# EAGLE board CT_schematic (EAGLE 7.6.0)

Size 100 x 80 mm. Coordinates in mm from the lower left corner, seen from the top.
Outline: 0,0 100,0 100,80 0,80 0,0
Copper layers (1*16): Top 0.035mm / dielectric 1.5mm / Bottom 0.035mm
Design rules "default": minimum track width 10mil, minimum drill 24mil, track to track 8mil, track to pad 8mil, pad to pad 8mil, via to via 8mil, smd to smd 8mil, copper to edge 40mil, drill to drill 8mil, minimum pad ring 10mil, minimum via ring 8mil, stop-mask expansion 4mil, vias tented up to drill 0mil, thermal gap 10mil

## Footprints (pad centres in the part's own frame; a part is rotated, then mirrored left to right if it is on the bottom)
C0603 = smd 0.8 x 0.8: 1 -0.762,0; 2 0.762,0
C0402 = smd 0.5 x 0.5: 1 -0.508,0; 2 0.508,0
C0805 = smd 1.2 x 1.3: 1 -1.016,0; 2 1.016,0
C1210 = smd 1.2 x 2.5: 1 -1.524,0; 2 1.524,0
R0603 = smd 0.8 x 0.8: 1 -0.762,0; 2 0.762,0
EXV-9H = smd 3.505 x 1.676: 1 -2.857,0; 2 2.857,0
L0603 = smd 0.8 x 0.8: 1 -0.762,0; 2 0.762,0
PJ-037B_PACKAGE = drill 3.7 square: 1 12,0 | drill 3.2 square: 2 6,0
WLCSP90 = smd 0.25 x 0.25: A1 -1.8,1.6; A2 -1.4,1.6; A3 -1,1.6; A4 -0.6,1.6; A5 -0.2,1.6; A6 0.2,1.6; A7 0.6,1.6; A8 1,1.6; A9 1.4,1.6; A10 1.8,1.6; B1 -1.8,1.2; B2 -1.4,1.2; B3 -1,1.2; B4 -0.6,1.2; B5 -0.2,1.2; B6 0.2,1.2; B7 0.6,1.2; B8 1,1.2; B9 1.4,1.2; B10 1.8,1.2; C1 -1.8,0.8; C2 -1.4,0.8; C3 -1,0.8; C4 -0.6,0.8; C5 -0.2,0.8; C6 0.2,0.8; C7 0.6,0.8; C8 1,0.8; C9 1.4,0.8; C10 1.8,0.8; D1 -1.8,0.4; D2 -1.4,0.4; D3 -1,0.4; D4 -0.6,0.4; D5 -0.2,0.4; D6 0.2,0.4; D7 0.6,0.4; D8 1,0.4; D9 1.4,0.4; D10 1.8,0.4; E1 -1.8,0; E2 -1.4,0; E3 -1,0; E4 -0.6,0; E5 -0.2,0; E6 0.2,0; E7 0.6,0; E8 1,0; E9 1.4,0; E10 1.8,0; F1 -1.8,-0.4; F2 -1.4,-0.4; F3 -1,-0.4; F4 -0.6,-0.4; F5 -0.2,-0.4; F6 0.2,-0.4; F7 0.6,-0.4; F8 1,-0.4; F9 1.4,-0.4; F10 1.8,-0.4; G1 -1.8,-0.8; G2 -1.4,-0.8; G3 -1,-0.8; G4 -0.6,-0.8; G5 -0.2,-0.8; G6 0.2,-0.8; G7 0.6,-0.8; G8 1,-0.8; G9 1.4,-0.8; G10 1.8,-0.8; H1 -1.8,-1.2; H2 -1.4,-1.2; H3 -1,-1.2; H4 -0.6,-1.2; H5 -0.2,-1.2; H6 0.2,-1.2; H7 0.6,-1.2; H8 1,-1.2; H9 1.4,-1.2; H10 1.8,-1.2; J1 -1.8,-1.6; J2 -1.4,-1.6; J3 -1,-1.6; J4 -0.6,-1.6; J5 -0.2,-1.6; J6 0.2,-1.6; J7 0.6,-1.6; J8 1,-1.6; J9 1.4,-1.6; J10 1.8,-1.6
SAMTEC_FTSH-105-01-L-DV-K = smd 0.762 x 2.794: 1 -2.54,-2.032; 2 -2.54,2.032; 3 -1.27,-2.032; 4 -1.27,2.032; 5 0,-2.032; 6 0,2.032; 7 1.27,-2.032; 8 1.27,2.032; 9 2.54,-2.032; 10 2.54,2.032
SOT-23-8 = smd 0.4 x 1.2: 1 -0.975,-1.3; 2 -0.325,-1.3; 3 0.325,-1.3; 4 0.975,-1.3; 5 0.975,1.3; 6 0.325,1.3; 7 -0.325,1.3; 8 -0.975,1.3
182-009-MALE = drill 1.194 pad 1.524 octagon: 1 -5.537,10.923; 2 -2.769,10.923; 3 0,10.923; 4 2.769,10.923; 5 5.537,10.923; 6 -4.153,8.08; 7 -1.384,8.08; 8 1.384,8.08; 9 4.153,8.08 | hole 3.048: -12.446,9.501; 12.446,9.501
MOLEX_47219-2001 = smd 0.8 x 1.5: 1 3.2,-2.1; 2 2.1,-2.1; 3 1,-2.1; 4 -0.1,-2.1; 5 -1.2,-2.1; 6 -2.3,-2.1; 7 -3.4,-2.1; 8 -4.5,-2.1 | smd 1.5 x 2.05: G1 6.875,-4.7; G2 6.875,3.6; G3 -6.875,3.6; G4 -6.875,-4.7
VFBGA-63 = smd 0.4 x 0.4: A1 -3.6,4.4; A2 -2.8,4.4; A9 2.8,4.4; A10 3.6,4.4; B1 -3.6,3.6; B9 2.8,3.6; B10 3.6,3.6; C3 -2,2.8; C4 -1.2,2.8; C5 -0.4,2.8; C6 0.4,2.8; C7 1.2,2.8; C8 2,2.8; D3 -2,2; D4 -1.2,2; D5 -0.4,2; D6 0.4,2; D7 1.2,2; D8 2,2; E3 -2,1.2; E4 -1.2,1.2; E5 -0.4,1.2; E6 0.4,1.2; E7 1.2,1.2; E8 2,1.2; F3 -2,0.4; F4 -1.2,0.4; F5 -0.4,0.4; F6 0.4,0.4; F7 1.2,0.4; F8 2,0.4; G3 -2,-0.4; G4 -1.2,-0.4; G5 -0.4,-0.4; G6 0.4,-0.4; G7 1.2,-0.4; G8 2,-0.4; H3 -2,-1.2; H4 -1.2,-1.2; H5 -0.4,-1.2; H6 0.4,-1.2; H7 1.2,-1.2; H8 2,-1.2; J3 -2,-2; J4 -1.2,-2; J5 -0.4,-2; J6 0.4,-2; J7 1.2,-2; J8 2,-2; K3 -2,-2.8; K4 -1.2,-2.8; K5 -0.4,-2.8; K6 0.4,-2.8; K7 1.2,-2.8; K8 2,-2.8; L1 -3.6,-3.6; L2 -2.8,-3.6; L9 2.8,-3.6; L10 3.6,-3.6; M1 -3.6,-4.4; M2 -2.8,-4.4; M9 2.8,-4.4; M10 3.6,-4.4
ABLS-25.000MHZ-B2F-T = smd 5.6 x 2.8: 1 -3.81,0; 2 5.69,0
ASEK = smd 1.4 x 1: 1 -1.1,-0.8; 2 1.1,-0.8; 3 1.1,0.8; 4 -1.1,0.8
WSON-8 = smd 0.3 x 0.6: 1 -0.75,0; 2 0.05,0; 3 0.85,0; 4 1.65,0; 5 1.65,3.8; 6 0.85,3.8; 7 0.05,3.8; 8 -0.75,3.8 | smd 3 x 2.6: PAD 0.45,1.9
QFN-38_UHF = smd 0.75 x 0.3: 1 -2.4,2.75; 2 -2.4,2.25; 3 -2.4,1.75; 4 -2.4,1.25; 6 -2.4,0.25; 7 -2.4,-0.25; 8 -2.4,-0.75; 9 -2.4,-1.25; 10 -2.4,-1.75; 11 -2.4,-2.25; 12 -2.4,-2.75; 20 2.4,-2.75; 21 2.4,-2.25; 22 2.4,-1.75; 23 2.4,-1.25; 24 2.4,-0.75; 25 2.4,-0.25; 26 2.4,0.25; 27 2.4,0.75; 28 2.4,1.25; 29 2.4,1.75; 30 2.4,2.25; 31 2.4,2.75 | smd 0.758 x 0.3: 5 -2.4,0.75 | smd 0.3 x 0.75: 13 -1.5,-3.4; 14 -1,-3.4; 15 -0.5,-3.4; 16 0,-3.4; 17 0.5,-3.4; 18 1,-3.4; 19 1.5,-3.4; 32 1.5,3.4; 33 1,3.4; 34 0.5,3.4; 35 0,3.4; 36 -0.5,3.4; 37 -1,3.4; 38 -1.5,3.4 | smd 3.2 x 5.2: 39 0,0
IRF8306MTRPBF = smd 0.9 x 1.85: 1 0,0; 2 0,-2.35; 6 6.4,0; 7 6.4,-2.35 | smd 0.75 x 0.75: 3 1.75,-1.175 | smd 1.45 x 0.87: 4 3.5,-0.565; 5 3.5,-1.785
SW_4-1437565-2 = smd 1.4 x 2.1: 1 -2.23,4.55; 2 -2.23,-4.55; 3 2.23,4.55; 4 2.23,-4.55
LGM67K-G1J2-24-Z = smd 0.8 x 1.4: A -2,0; C 0,0
NC7SZ125M5X = smd 1.3 x 0.7: 1 -1.3,0.95; 2 -1.3,0; 3 -1.3,-0.95; 4 1.3,-0.95; 5 1.3,0.95
DUMMY_PACKAGE_230 = drill 0.3: 1 0,-1; 2 1.5,-1

## Placement (x,y rotation side)
C1  1e-06  [C0603]  -76.2,78.74 0 top  (outside the outline)
C2  1e-07  [C0603]  -80.01,78.74 0 top  (outside the outline)
C3  1e-07  [C0603]  -83.82,78.74 0 top  (outside the outline)
C4  1e-07  [C0603]  -15.24,83.82 0 top  (outside the outline)
C5  1e-07  [C0603]  -19.05,83.82 0 top  (outside the outline)
C6  1e-07  [C0603]  -22.86,83.82 0 top  (outside the outline)
C7  1e-07  [C0603]  -26.67,83.82 0 top  (outside the outline)
C8  4.7e-06  [C0603]  -64.77,78.74 0 top  (outside the outline)
C9  1e-08  [C0603]  -30.48,83.82 0 top  (outside the outline)
C10  1e-06  [C0603]  -34.29,83.82 0 top  (outside the outline)
C11  1e-07  [C0402]  -80.01,83.82 0 top  (outside the outline)
C12  1e-07  [C0402]  -83.82,83.82 0 top  (outside the outline)
C13  1e-11  [C0402]  -15.24,88.9 0 top  (outside the outline)
C14  1e-11  [C0402]  -19.05,88.9 0 top  (outside the outline)
C15  1e-07  [C0402]  -22.86,88.9 0 top  (outside the outline)
C16  1e-07  [C0402]  -26.67,88.9 0 top  (outside the outline)
C17  1e-07  [C0402]  -30.48,88.9 0 top  (outside the outline)
C18  1e-05  [C0805]  -27.94,67.31 0 top  (outside the outline)
C19  1e-07  [C0402]  -34.29,88.9 0 top  (outside the outline)
C20  1e-07  [C0402]  -38.1,88.9 0 top  (outside the outline)
C21  1e-07  [C0402]  -41.91,88.9 0 top  (outside the outline)
C22  1e-07  [C0402]  -45.72,88.9 0 top  (outside the outline)
C23  2.2e-06  [C0603]  -68.58,78.74 0 top  (outside the outline)
C24  1e-08  [C0402]  -49.53,88.9 0 top  (outside the outline)
C25  1e-08  [C0402]  -53.34,88.9 0 top  (outside the outline)
C26  1e-05  [C1210]  -59.69,59.69 0 top  (outside the outline)
C27  1e-05  [C0805]  -33.02,67.31 0 top  (outside the outline)
C28  1e-08  [C0402]  -57.15,88.9 0 top  (outside the outline)
C29  1e-05  [C1210]  -66.04,59.69 0 top  (outside the outline)
C30  1e-05  [C1210]  -72.39,59.69 0 top  (outside the outline)
C31  1e-08  [C0402]  -60.96,88.9 0 top  (outside the outline)
C32  1e-05  [C1210]  -78.74,59.69 0 top  (outside the outline)
C33  1e-05  [C0805]  -38.1,67.31 0 top  (outside the outline)
C34  1e-07  [C0402]  -64.77,88.9 0 top  (outside the outline)
C35  2.2e-06  [C0603]  -72.39,78.74 0 top  (outside the outline)
C36  2.45e-08  [R0603]  -35.56,73.66 0 top  (outside the outline)
C37  2.8258362168397e-09  [R0603]  -48.26,67.31 0 top  (outside the outline)
C38  7.105e-09  [R0603]  -60.96,67.31 0 top  (outside the outline)
C39  0.0001  [EXV-9H]  -82.55,50.8 0 top  (outside the outline)
C40  0.0001  [EXV-9H]  -17.78,60.96 0 top  (outside the outline)
C41  1e-08  [C0402]  -68.58,88.9 0 top  (outside the outline)
C42  1e-08  [C0402]  -72.39,88.9 0 top  (outside the outline)
F1  240.0  [L0603]  -38.1,83.82 0 top  (outside the outline)
J1  PJ-037B  [PJ-037B_PACKAGE]  -57.15,29.21 0 top  (outside the outline)
R2  1000.0  [R0603]  -41.91,83.82 0 top  (outside the outline)
R7  4700.0  [R0603]  -45.72,83.82 0 top  (outside the outline)
R8  10000.0  [R0603]  -40.64,73.66 0 top  (outside the outline)
R9  10000.0  [R0603]  -45.72,73.66 0 top  (outside the outline)
R10  10000.0  [R0603]  -50.8,73.66 0 top  (outside the outline)
R11  10000.0  [R0603]  -55.88,73.66 0 top  (outside the outline)
R12  10000.0  [R0603]  -60.96,73.66 0 top  (outside the outline)
R13  10000.0  [R0603]  -66.04,73.66 0 top  (outside the outline)
R14  5.0  [R0603]  -49.53,83.82 0 top  (outside the outline)
R15  120.0  [R0603]  -53.34,83.82 0 top  (outside the outline)
R16  100000.0  [R0603]  -66.04,67.31 0 top  (outside the outline)
R17  100000.0  [R0603]  -71.12,67.31 0 top  (outside the outline)
R18  100000.0  [R0603]  -76.2,67.31 0 top  (outside the outline)
R19  100000.0  [R0603]  -81.28,67.31 0 top  (outside the outline)
R20  100000.0  [R0603]  -86.36,67.31 0 top  (outside the outline)
R21  100000.0  [R0603]  -15.24,73.66 0 top  (outside the outline)
R22  10000.0  [R0603]  -71.12,73.66 0 top  (outside the outline)
R23  10000.0  [R0603]  -76.2,73.66 0 top  (outside the outline)
R24  10000.0  [R0603]  -81.28,73.66 0 top  (outside the outline)
R25  10000.0  [R0603]  -86.36,73.66 0 top  (outside the outline)
R26  10000.0  [R0603]  -15.24,78.74 0 top  (outside the outline)
R27  100000.0  [R0603]  -20.32,73.66 0 top  (outside the outline)
R28  200.0  [R0603]  -57.15,83.82 0 top  (outside the outline)
R29  1000.0  [R0603]  -60.96,83.82 0 top  (outside the outline)
R30  100000.0  [R0603]  -25.4,73.66 0 top  (outside the outline)
R31  2231.0  [R0603]  -64.77,83.82 0 top  (outside the outline)
R32  1000.0  [R0603]  -68.58,83.82 0 top  (outside the outline)
R33  100000.0  [R0603]  -30.48,73.66 0 top  (outside the outline)
R34  200.0  [R0603]  -72.39,83.82 0 top  (outside the outline)
R35  1000.0  [R0603]  -76.2,83.82 0 top  (outside the outline)
R36  10000.0  [R0603]  -20.32,78.74 0 top  (outside the outline)
R37  75000.0  [R0603]  -25.4,78.74 0 top  (outside the outline)
R38  10000.0  [R0603]  -30.48,78.74 0 top  (outside the outline)
R39  10000.0  [R0603]  -35.56,78.74 0 top  (outside the outline)
R40  95300.0  [R0603]  -40.64,78.74 0 top  (outside the outline)
R41  95300.0  [R0603]  -45.72,78.74 0 top  (outside the outline)
R42  10000.0  [R0603]  -50.8,78.74 0 top  (outside the outline)
R43  10000.0  [R0603]  -55.88,78.74 0 top  (outside the outline)
R44  10000.0  [R0603]  -60.96,78.74 0 top  (outside the outline)
R45  103345.45454545  [R0603]  -55.88,67.31 0 top  (outside the outline)
U1  STM32F405OEY6  [WLCSP90]  -44.45,52.07 0 top  (outside the outline)
U2  FTSH-105-01-L-DV-K  [SAMTEC_FTSH-105-01-L-DV-K]  -35.56,30.48 0 top  (outside the outline)
U3  MAX3051EKA+T  [SOT-23-8]  -83.82,58.42 0 top  (outside the outline)
U4  182-009-113R531  [182-009-MALE]  -36.83,6.35 0 top  (outside the outline)
U5  0472192001  [MOLEX_47219-2001]  -62.23,8.89 0 top  (outside the outline)
U6  mt29f4g08abadah4  [VFBGA-63]  -63.5,27.94 0 top  (outside the outline)
U7  ABLS-25.000MHZ-B2F-T  [ABLS-25.000MHZ-B2F-T]  -36.83,60.96 0 top  (outside the outline)
U8  ASEK-32.768KHz-ECST  [ASEK]  -73.66,50.8 0 top  (outside the outline)
U9  LP3878SDX-ADJ/NOPB  [WSON-8]  -60.96,40.64 0 top  (outside the outline)
U10  LP3878SDX-ADJ/NOPB  [WSON-8]  -81.28,40.64 0 top  (outside the outline)
U11  LP3878SDX-ADJ/NOPB  [WSON-8]  -30.48,49.53 0 top  (outside the outline)
U12  LTC2928CUHF#PBF  [QFN-38_UHF]  -52.07,50.8 0 top  (outside the outline)
U13  IRF8306MTRPbF  [IRF8306MTRPBF]  -26.67,43.18 0 top  (outside the outline)
U14  IRF8306MTRPbF  [IRF8306MTRPBF]  -41.91,43.18 0 top  (outside the outline)
U15  4-1437565-2  [SW_4-1437565-2]  -83.82,27.94 0 top  (outside the outline)
U16  Q65110A2395  [LGM67K-G1J2-24-Z]  -48.26,59.69 0 top  (outside the outline)
U17  nc7sz125m5x  [NC7SZ125M5X]  -15.24,67.31 0 top  (outside the outline)
U18  nc7sz125m5x  [NC7SZ125M5X]  -21.59,67.31 0 top  (outside the outline)
U19  Dummy  [DUMMY_PACKAGE_230]  -77.47,88.9 0 top  (outside the outline)

## Library data of the parts
C1-C42 F1 J1 R2 R7-R45 U1-U19 = circuit_tree

## Nets
CLK_CRYSTAL_U1_F9: C13.1 U1.F9 U7.1
CLK_CRYSTAL_U1_F10: C14.1 U1.F10 U7.2
CLK_U1_B10: U1.B10 U8.3
GND: C1.2 C2.2 C3.2 C4.2 C5.2 C6.2 C7.2 C8.2 C9.2 C10.2 C11.2 C12.2 C13.2 C14.2 C15.2 C16.2 C17.2 C18.2 C19.2 C20.2 C21.2 C22.2 C23.2 C24.2 C25.2 C26.2 C27.2 C28.2 C29.2 C30.2 C31.2 C32.2 C33.2 C34.2 C35.2 C36.2 C37.2 C38.2 C39.2 C40.2 C41.2 C42.2 J1.2 R2.2 R9.2 R14.2 R29.2 R32.2 R35.2 R37.2 R40.2 R41.2 R42.2 R43.2 R44.2 U1.C9 U1.E5 U1.E7 U1.E8 U1.H10 U2.3 U2.5 U3.2 U3.8 U4.5 U5.6 U5.G1 U5.G2 U5.G3 U5.G4 U6.C5 U6.F7 U6.K3 U6.K8 U8.2 U9.3 U9.PAD U10.3 U10.PAD U11.3 U11.PAD U12.8 U12.9 U12.10 U12.12 U12.13 U12.24 U12.25 U12.30 U12.32 U12.39 U16.C U17.2 U17.3 U18.1 U18.3 U19.1
NET_U1_A7: R9.1 U1.A7
NET_U1_A8: R8.1 U1.A8
NET_U1_B1: C12.1 U1.B1
NET_U1_D9: R10.1 U1.D9
NET_U1_G9: C9.1 C10.1 F1.1 U1.G9
NET_U1_G10: R7.1 U1.G10 U18.4
NET_U1_J9: U16.A
NET_U1_J10: U15.3 U15.4
NET_U2_9: R14.1 U2.9
NET_U3_6: R15.2 U3.6
NET_U4_2: R15.2 U3.6 U4.2
NET_U4_3: R15.1 U3.7 U4.3
NET_U6_C3: R26.1 U6.C3
NET_U9_1: C25.1 U9.1
NET_U9_6: R28.2 R29.1 U9.6
NET_U9_8: R27.1 U9.8
NET_U10_1: C28.1 U10.1
NET_U10_6: R31.2 R32.1 U10.6
NET_U10_8: R30.1 U10.8
NET_U11_1: C31.1 U11.1
NET_U11_6: R34.2 R35.1 U11.6
NET_U11_8: R33.1 U11.8
NET_U12_3: R43.1 U12.3
NET_U12_6: R40.1 U12.6
NET_U12_7: R41.1 U12.7
NET_U12_16: R42.1 R45.1 U12.16
NET_U12_18: R39.1 U12.18
NET_U12_19: R38.1 U12.19 U12.20
NET_U12_21: R36.1 R37.1 U12.21 U17.4 U18.2
NET_U12_22: C34.1 R36.2 R38.2 R39.2 U12.11 U12.22
NET_U12_26: C37.1 U12.26
NET_U12_27: C36.1 U12.27
NET_U12_28: C38.1 U12.28
NET_U12_38: R44.1 U12.38
NET_U13_3: U12.2 U13.3
NET_U14_3: U12.37 U14.3
NET_U15_1: R2.1 U15.1 U15.2
PROC_CAN1_RX: U1.C1 U3.4
PROC_CAN1_TX: U1.C2 U3.1
PROC_DAC_OUT2: U1.G8 U19.2
PROC_FSMC_D0: U1.F2 U6.H4
PROC_FSMC_D1: U1.F1 U6.J4
PROC_FSMC_D2: U1.D6 U6.K4
PROC_FSMC_D3: U1.C5 U6.K5
PROC_FSMC_D4: U1.G6 U6.K6
PROC_FSMC_D5: U1.H6 U6.J7
PROC_FSMC_D6: U1.J6 U6.K7
PROC_FSMC_D7: U1.F6 U6.J8
PROC_FSMC_NCE2: R23.1 U1.A5 U6.C6
PROC_FSMC_NOE: R25.1 U1.A4 U6.D4
PROC_FSMC_NWAIT: R22.1 U1.B5 U6.C8
PROC_FSMC_NWE: R24.1 U1.C6 U6.C7
PROC_SDIO_CK: R17.1 U1.A3 U5.5
PROC_SDIO_CMD: R16.1 U1.B4 U5.3
PROC_SDIO_D0: R18.1 U1.E2 U5.7
PROC_SDIO_D1: R19.1 U1.E3 U5.8
PROC_SDIO_D2: R20.1 U1.D5 U5.1
PROC_SDIO_D3: R21.1 U1.C4 U5.2
PROC_SYS_JTCK_SWCLK: R12.1 U1.A2 U2.4
PROC_SYS_JTDO_SWO: U1.B6 U2.6
PROC_SYS_JTMS_SWDIO: R13.1 U1.D4 U2.2
RST_OUT_U2_JTAG_RST_B: R11.1 U2.10 U17.1
VCC_12V7: C35.1 C39.1 C40.1 J1.1 R45.2 U12.23 U13.1 U13.2 U13.6 U13.7 U14.1 U14.2 U14.6 U14.7
VCC_S1_12V7: C26.1 C29.1 R27.2 R30.2 U9.4 U10.4 U13.4 U13.5
VCC_S2_12V7: C32.1 R33.2 U11.4 U14.4 U14.5
VCC_TIER1_1V2: C11.1 C27.1 R28.1 U1.F4 U9.5
VCC_TIER1_3V3: C1.1 C2.1 C3.1 C4.1 C5.1 C6.1 C7.1 C8.1 C15.1 C16.1 C17.1 C18.1 C19.1 C20.1 C21.1 C22.1 C23.1 C24.1 C30.1 C41.1 C42.1 F1.2 R7.2 R8.2 R10.2 R11.2 R12.2 R13.2 R16.2 R17.2 R18.2 R19.2 R20.2 R21.2 R22.2 R23.2 R24.2 R25.2 R26.2 R31.1 U1.A1 U1.A10 U1.B8 U1.E4 U1.E6 U1.F7 U2.1 U3.3 U5.4 U6.D3 U6.G4 U6.H8 U6.J6 U8.4 U10.5 U17.5 U18.5
VCC_TIER2_1V2: C33.1 R34.1 U11.5

## Tracks (layer width: path | path; a pad name or v marks a point on that pad's centre or on a via)
CLK_CRYSTAL_U1_F9  (2 unrouted)
CLK_CRYSTAL_U1_F10  (2 unrouted)
CLK_U1_B10  (1 unrouted)
GND  (96 unrouted)
NET_U1_A7  (1 unrouted)
NET_U1_A8  (1 unrouted)
NET_U1_B1  (1 unrouted)
NET_U1_D9  (1 unrouted)
NET_U1_G9  (3 unrouted)
NET_U1_G10  (2 unrouted)
NET_U1_J10  (1 unrouted)
NET_U2_9  (1 unrouted)
NET_U3_6  (1 unrouted)
NET_U4_2  (2 unrouted)
NET_U4_3  (2 unrouted)
NET_U6_C3  (1 unrouted)
NET_U9_1  (1 unrouted)
NET_U9_6  (2 unrouted)
NET_U9_8  (1 unrouted)
NET_U10_1  (1 unrouted)
NET_U10_6  (2 unrouted)
NET_U10_8  (1 unrouted)
NET_U11_1  (1 unrouted)
NET_U11_6  (2 unrouted)
NET_U11_8  (1 unrouted)
NET_U12_3  (1 unrouted)
NET_U12_6  (1 unrouted)
NET_U12_7  (1 unrouted)
NET_U12_16  (2 unrouted)
NET_U12_18  (1 unrouted)
NET_U12_19  (2 unrouted)
NET_U12_21  (4 unrouted)
NET_U12_22  (5 unrouted)
NET_U12_26  (1 unrouted)
NET_U12_27  (1 unrouted)
NET_U12_28  (1 unrouted)
NET_U12_38  (1 unrouted)
NET_U13_3  (1 unrouted)
NET_U14_3  (1 unrouted)
NET_U15_1  (2 unrouted)
PROC_CAN1_RX  (1 unrouted)
PROC_CAN1_TX  (1 unrouted)
PROC_DAC_OUT2  (1 unrouted)
PROC_FSMC_D0  (1 unrouted)
PROC_FSMC_D1  (1 unrouted)
PROC_FSMC_D2  (1 unrouted)
PROC_FSMC_D3  (1 unrouted)
PROC_FSMC_D4  (1 unrouted)
PROC_FSMC_D5  (1 unrouted)
PROC_FSMC_D6  (1 unrouted)
PROC_FSMC_D7  (1 unrouted)
PROC_FSMC_NCE2  (2 unrouted)
PROC_FSMC_NOE  (2 unrouted)
PROC_FSMC_NWAIT  (2 unrouted)
PROC_FSMC_NWE  (2 unrouted)
PROC_SDIO_CK  (2 unrouted)
PROC_SDIO_CMD  (2 unrouted)
PROC_SDIO_D0  (2 unrouted)
PROC_SDIO_D1  (2 unrouted)
PROC_SDIO_D2  (2 unrouted)
PROC_SDIO_D3  (2 unrouted)
PROC_SYS_JTCK_SWCLK  (2 unrouted)
PROC_SYS_JTDO_SWO  (1 unrouted)
PROC_SYS_JTMS_SWDIO  (2 unrouted)
RST_OUT_U2_JTAG_RST_B  (2 unrouted)
VCC_12V7  (13 unrouted)
VCC_S1_12V7  (7 unrouted)
VCC_S2_12V7  (4 unrouted)
VCC_TIER1_1V2  (4 unrouted)
VCC_TIER1_3V3  (56 unrouted)
VCC_TIER2_1V2  (2 unrouted)